# EAGLE board open-bldc-logic-teardrops (EAGLE 5.06)
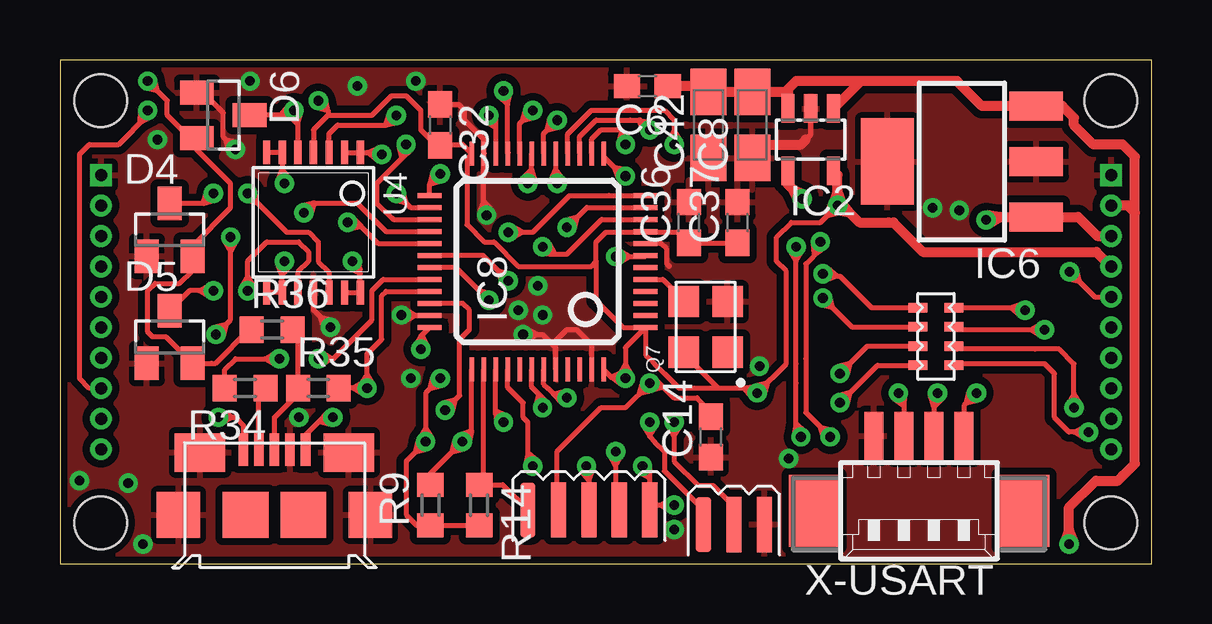
[diagram p0: board, top side]
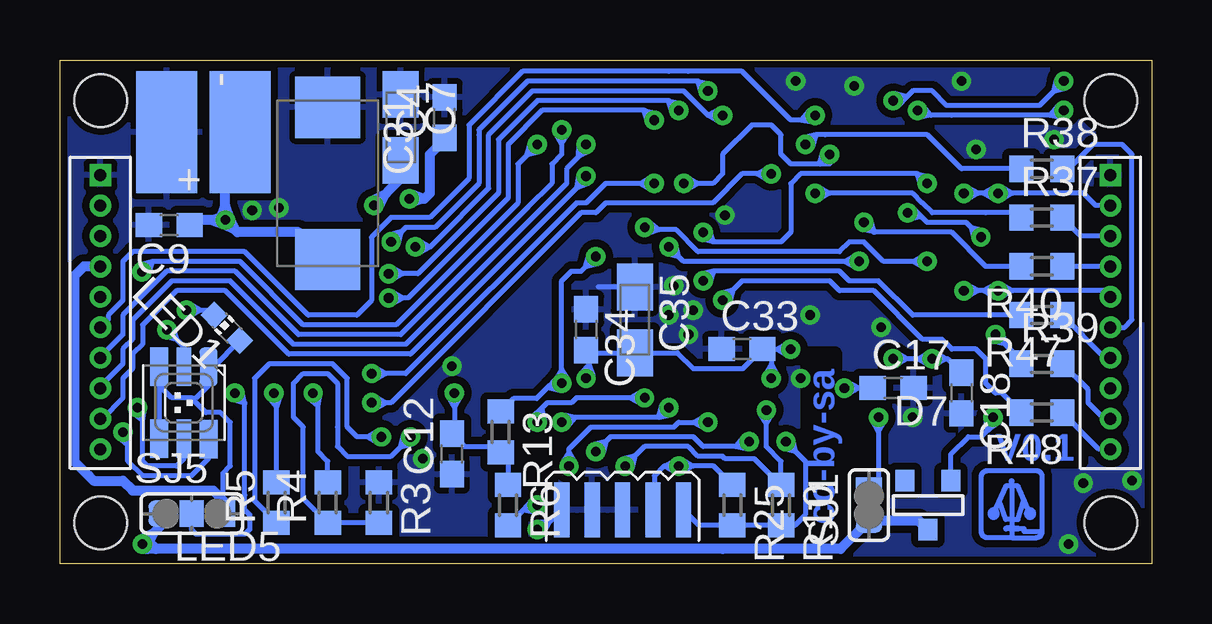
[diagram p1: board, bottom side, seen from below]

Size 45.5 x 21 mm. Coordinates in mm from the lower left corner, seen from the top.
Outline: 0,0 45.5,0 45.5,21 0,21 0,0
Copper layers (1*16): Top 0.035mm / dielectric 1.5mm / Bottom 0.035mm
Design rules "open-bldc *": minimum track width 7mil, minimum drill 0.3mm, track to track 8mil, track to pad 8mil, pad to pad 8mil, via to via 8mil, smd to smd 8mil, copper to edge 10mil, drill to drill 8mil, minimum pad ring 8mil, minimum via ring 8mil, stop-mask expansion 4mil, vias tented up to drill 0.4mm, thermal gap 10mil
Net classes: 0 default: width 0.152 mm, drill 0.305 mm, clearance 0.152 mm
Holes 2.2 mm at 1.7,1.7 43.8,1.7 43.8,19.3 1.7,19.3

## Footprints (pad centres in the part's own frame; a part is rotated, then mirrored left to right if it is on the bottom)
SMD2,54-5,08 = smd 2.54 x 5.08: 1 0,0
C0603 = smd 1.1 x 1: 1 -0.85,0; 2 0.85,0
A/3216-18R = smd 1.95 x 1.5: + 1.375,0; - -1.375,0
D/7343-31R = smd 2.55 x 2.7: + 3.175,0; - -3.175,0
SOT23 = smd 1 x 1.4: 1 -0.95,-1.1; 2 0.95,-1.1; 3 0,1.1
SOT-23 = smd 0.787 x 0.889: 1 0.025,-1.016; 2 -0.94,1.016; 3 0.991,1.016
PIN_HDR_EDG_1.27MM_3-1 = smd 2.3 x 0.635: P$1 0,0; P$2 0,1.27; P$3 0,2.54
SOT23-5 = smd 0.55 x 1.2: 1 -0.95,-1.3; 2 0,-1.3; 3 0.95,-1.3; 4 0.95,1.3; 5 -0.95,1.3
SOT223 = smd 1.219 x 2.235: 1 -2.311,-3.099; 2 0,-3.099; 3 2.311,-3.099 | smd 3.6 x 2.2: 4 0,3.099
LQFP48 = smd 0.2 x 1: 1 -2.75,-4.5; 2 -2.25,-4.5; 3 -1.75,-4.5; 4 -1.25,-4.5; 5 -0.75,-4.5; 6 -0.25,-4.5; 7 0.25,-4.5; 8 0.75,-4.5; 9 1.25,-4.5; 10 1.75,-4.5; 11 2.25,-4.5; 12 2.75,-4.5; 25 2.75,4.5; 26 2.25,4.5; 27 1.75,4.5; 28 1.25,4.5; 29 0.75,4.5; 30 0.25,4.5; 31 -0.25,4.5; 32 -0.75,4.5; 33 -1.25,4.5; 34 -1.75,4.5; 35 -2.25,4.5; 36 -2.75,4.5 | smd 1 x 0.2: 13 4.5,-2.75; 14 4.5,-2.25; 15 4.5,-1.75; 16 4.5,-1.25; 17 4.5,-0.75; 18 4.5,-0.25; 19 4.5,0.25; 20 4.5,0.75; 21 4.5,1.25; 22 4.5,1.75; 23 4.5,2.25; 24 4.5,2.75; 37 -4.5,2.75; 38 -4.5,2.25; 39 -4.5,1.75; 40 -4.5,1.25; 41 -4.5,0.75; 42 -4.5,0.25; 43 -4.5,-0.25; 44 -4.5,-0.75; 45 -4.5,-1.25; 46 -4.5,-1.75; 47 -4.5,-2.25; 48 -4.5,-2.75
PIN_HDR_1.27MM_10 = drill 0.5 square: P$1 0,0 | drill 0.5 round: P$2 0,1.27; P$3 0,2.54; P$4 0,3.81; P$5 0,5.08; P$6 0,6.35; P$7 0,7.62; P$8 0,8.89; P$9 0,10.16; P$10 0,11.43
PIN_HDR_EDG_1.27MM_5-2 = smd 2.3 x 0.635: P$1 0,0; P$3 0,1.27; P$5 0,2.54; P$7 0,3.81; P$9 0,5.08 | smd 2.3 x 0.635 bottom: P$2 0,0; P$4 0,1.27; P$6 0,2.54; P$8 0,3.81; P$10 0,5.08
CHIP-LED0603 = smd 0.8 x 0.8: A 0,-0.75; C 0,0.75
PLCC6 = smd 0.75 x 1.6: A1 -1.025,-1.5; A2 1.025,-1.5; A3 1.025,1.5; C1 -1.025,1.525 | smd 0.6 x 1.6: C2 0,-1.5; C3 0,1.5
ASE_OSCILLATOR = smd 1.295 x 1.27: 1 -1.041,-0.902; 2 1.067,-0.902; 3 1.067,0.927; 4 -1.041,0.927
R0603 = smd 1 x 1.1: 1 -0.85,0; 2 0.85,0
R4N1206 = smd 0.4 x 0.8: 1 0,0; 2 0,1.5; 3 0.8,0; 4 0.8,1.5; 5 1.6,0; 6 1.6,1.5; 7 2.4,0; 8 2.4,1.5
SJ1S = smd 1 x 1.1: 1 -0.65,-0.005; 2 0.65,-0.005
SJ2S = smd 1 x 1.1: 1 -1.3,0; 2 0,0; 3 1.3,0
ZX62-B-5PA = smd 1.8 x 1.9: GND_LEFT -4,0; GND_RIGHT 4,0 | smd 1.9 x 1.9: GND_MID_LEFT -1.2,0; GND_MID_RIGHT 1.2,0 | smd 2.1 x 1.6: GND_UP_LEFT -3.1,2.6; GND_UP_RIGHT 3.1,2.6 | smd 0.4 x 1.35: PIN_1 -1.3,2.725; PIN_2 -0.65,2.725; PIN_3 0,2.725; PIN_4 0.65,2.725; PIN_5 1.3,2.725
TSSOP_14 = smd 0.305 x 0.991: 1 -1.95,-2.918; 2 -1.3,-2.918; 3 -0.65,-2.918; 4 0,-2.918; 5 0.65,-2.918; 6 1.3,-2.918; 7 1.95,-2.918; 8 1.95,2.918; 9 1.3,2.918; 10 0.65,2.918; 11 0,2.918; 12 -0.65,2.918; 13 -1.3,2.918; 14 -1.95,2.918
53261-04 = smd 0.8 x 2: 1 1.875,-2.5; 2 0.625,-2.5; 3 -0.625,-2.5; 4 -1.875,-2.5 | smd 2.1 x 3: S1 4.375,0.625; S2 -4.375,0.625

## Placement (x,y rotation side)
+  BATT+  [SMD2,54-5,08]  38,17.98 0 bottom
-  BATT-  [SMD2,54-5,08]  41.05,17.98 180 bottom
C4  10nF  [C0603]  29.46,18.59 90 bottom
C6  100nF  [C0603]  24.49,19.91 180 top
C7  4µ7  [A/3216-18R]  31.29,18.19 270 bottom
C8  1µ  [A/3216-18R]  28.85,18.29 90 top
C9  100n  [C0603]  40.94,14.12 180 bottom
C12  10nF  [C0603]  29.16,4.57 90 bottom
C14  100nF  [C0603]  27.13,5.28 90 top
C17  47p  [C0603]  10.77,7.32 0 bottom
C18  47p  [C0603]  7.92,7.11 270 bottom
C31  100µ  [D/7343-31R]  34.34,15.85 270 bottom
C32  100nF  [C0603]  15.85,18.29 270 top
C33  100nF  [C0603]  17.07,8.94 0 bottom
C34  100nF  [C0603]  23.57,9.75 270 bottom
C35  4µ7  [A/3216-18R]  21.54,10.16 270 bottom
C36  10nF  [C0603]  26.21,14.22 90 top
C37  1µ  [C0603]  28.24,14.22 90 top
C42  4µ7  [A/3216-18R]  27.03,18.29 90 top
D4  BAS70-04  [SOT23]  4.57,13.92 0 top
D5  BAS70-04  [SOT23]  4.57,9.45 0 top
D6  BAS70-04  [SOT23]  6.81,18.69 270 top
D7  BAS21  [SOT-23]  9.35,2.44 0 bottom
I2C  PIN_HDR_EDG_1.27MM_3-1  [PIN_HDR_EDG_1.27MM_3-1]  26.82,1.63 270 top
IC2  LP2992  [SOT23-5]  31.29,17.68 180 top
IC6  5V vreg  [SOT223]  37.59,16.76 90 top
IC8  STM32-48  [LQFP48]  19.91,12.6 90 top
JP11  PIN_HDR_1.27MM_10  [PIN_HDR_1.27MM_10]  1.71,16.2 180 bottom
JP12  PIN_HDR_1.27MM_10  [PIN_HDR_1.27MM_10]  43.81,16.2 180 bottom
JTAG  PIN_HDR_EDG_1.27MM_5-2  [PIN_HDR_EDG_1.27MM_5-2]  19.51,2.24 270 top
LED1  AMBER  [CHIP-LED0603]  38.54,9.83 45 bottom
LED5  LED_LRTB_G6TG  [PLCC6]  40.34,6.71 180 bottom
Q7  8MHz  [ASE_OSCILLATOR]  26.92,9.86 90 top
R3  10k  [R0603]  32.21,2.54 270 bottom
R4  100R  [R0603]  34.34,2.54 90 bottom
R5  100R  [R0603]  36.47,2.54 90 bottom
R6  10k  [R0603]  26.82,2.44 270 bottom
R9  10k  [R0603]  15.44,2.44 90 top
R10  10k  [R0603]  15.44,2.44 270 bottom
R13  10k  [R0603]  27.13,5.49 270 bottom
R14  10k  [R0603]  17.48,2.44 270 top
R25  10k  [R0603]  17.48,2.44 270 bottom
R34  22  [R0603]  7.72,7.32 180 top
R35  22  [R0603]  10.77,7.32 0 top
R36  1k5  [R0603]  8.84,9.75 0 top
R37  1k  [R0603]  4.57,14.43 0 bottom
R38  1k  [R0603]  4.57,16.46 0 bottom
R39  1k  [R0603]  4.57,8.33 0 bottom
R40  1k  [R0603]  4.57,12.4 180 bottom
R47  1k  [R0603]  4.57,10.36 180 bottom
R48  1k  [R0603]  4.57,6.3 180 bottom
RN1  1k  [R4N1206]  35.76,10.67 270 top
SJ1  [SJ1S]  11.79,2.44 90 bottom
SJ5  SJ2S  [SJ2S]  40.01,2.08 0 bottom
U3  ZX62-B-5PA  [ZX62-B-5PA]  8.94,2.03 0 top
U4  MCP6004  [TSSOP_14]  10.57,14.22 180 top
X-USART  53261-04  [53261-04]  35.81,2.83 180 top

## Library data of the parts
+ - = wirepad
C4 C6-C9 C12 C14 C17 C18 C31-C37 C42 R3-R6 R9 R10 R13 R14 R25 R34-R40 R47 R48 = rcl
D4-D6 = diode
D7 = zetex
I2C IC2 IC8 JP11 JP12 JTAG LED5 Q7 RN1 SJ1 SJ5 U3 U4 = open-bldc
IC6 = linear-technology
LED1 = led
X-USART = con-molex

## Nets
+3V3: C7.+ C12.2 C32.2 C33.2 C34.2 C35.+ C36.1 C37.1 D4.2 D5.2 D6.2 IC2.5 IC8.1 IC8.9 IC8.24 IC8.36 IC8.48 JP12.P$4 JTAG.P$2 LED1.A LED5.A1 LED5.A2 LED5.A3 Q7.4 R6.1 R9.1 R10.2 R13.2 R14.2 R25.2 R36.1 SJ5.3 U4.4
+5V: C6.1 C8.+ C42.+ D7.1 IC2.1 IC2.3 IC6.3 JP12.P$2 SJ1.1 SJ5.1
+12V: +.1 C9.1 C31.+ IC6.1 JP12.P$3
BUF_I/BEMF_A: IC8.10 U4.13 U4.14
BUF_I/BEMF_B: IC8.11 U4.8 U4.9
BUF_I/BEMF_C: IC8.12 U4.6 U4.7
BUF_I_SENSE: IC8.19 U4.1 U4.2
CTRL_A+: JP11.P$4 R40.1
CTRL_A-: JP11.P$3 R37.2
CTRL_B+: JP11.P$7 R47.1
CTRL_B-: JP11.P$6 R38.2
CTRL_C+: JP11.P$10 R48.1
CTRL_C-: JP11.P$9 R39.2
GND: -.1 C4.2 C6.2 C7.- C8.- C9.2 C12.1 C14.1 C17.2 C18.2 C31.- C32.1 C33.1 C34.1 C35.- C36.2 C37.2 C42.- D4.1 D5.1 D6.1 I2C.P$3 IC2.2 IC6.2 IC6.4 IC8.8 IC8.23 IC8.35 IC8.44 IC8.47 JP11.P$1 JP12.P$1 JTAG.P$6 JTAG.P$8 JTAG.P$10 Q7.2 R3.1 U3.GND_LEFT U3.GND_RIGHT U3.GND_UP_LEFT U3.GND_UP_RIGHT U3.PIN_4 U4.11 X-USART.1
I/BEMF_A: D4.3 JP11.P$2 U4.12
I/BEMF_B: D5.3 JP11.P$5 U4.10
I/BEMF_C: D6.3 JP11.P$8 U4.5
I_SENSE: JP12.P$6 U4.3
LED1: IC8.20 RN1.1
LED2: IC8.18 RN1.3
LED3: IC8.17 RN1.5
LED4: IC8.25 RN1.7
MOT_TEMP: IC8.14 JP12.P$8
N$1: IC8.29 R40.2
N$2: LED5.C1 RN1.8
N$3: LED1.C RN1.2
N$4: LED5.C3 RN1.6
N$5: LED5.C2 RN1.4
N$6: IC8.26 R37.1
N$8: SJ5.2 X-USART.4
N$9: R4.2 X-USART.2
N$20: R5.2 X-USART.3
N$22: C4.1 IC2.4
N$25: R34.1 U3.PIN_2
N$26: SJ1.2 U3.PIN_5
N$28: R35.1 R36.2 U3.PIN_3
N$36: IC8.27 R38.1
N$39: IC8.28 R39.1
N$40: IC8.5 Q7.3
N$42: IC8.30 R47.2
N$45: IC8.31 R48.2
NC: JP12.P$10
PS_ID: IC8.16 JP12.P$5
RST: C14.2 IC8.7 JTAG.P$3 R13.1
RXD: IC8.22 R3.2 R4.1
SCL: I2C.P$1 IC8.42
SDA: I2C.P$2 IC8.43
TCK: IC8.37 JTAG.P$7 R9.2
TDI: IC8.38 JTAG.P$1 R14.1
TDO: IC8.39 JTAG.P$9 R6.2
TEMP: IC8.15 JP12.P$7
TMS: IC8.34 JTAG.P$5 R10.1
TRST: IC8.40 JTAG.P$4 R25.1
TXD: IC8.21 R5.1
USB_+5V: D7.3 U3.PIN_1
USB_DM: C18.1 IC8.32 R34.2
USB_DP: C17.1 IC8.33 R35.2
V_BATT: IC8.13 JP12.P$9

## Tracks (layer width: path | path; a pad name or v marks a point on that pad's centre or on a via)
+3V3  (via drill 0.4)
  Top 0.203: v23.57,7.72 23.04,7.72 IC8.48 | IC8.1 23.57,9.01 v23.57,7.72 | v15.04,8.94 15.04,9.47 IC8.36 | IC8.1 24.41,8.71 24.59,8.53 24.79,8.33 25.2,7.92 25.4,7.72 25.81,7.32 27.43,7.32 | 27.43,7.32 28.85,7.32 v29.06,7.11 | U4.4 10.57,18.09 11.18,18.69 | 11.18,18.69 13.01,18.69 13.82,19.51 14.43,19.51 15.04,18.9 15.04,18.09 15.68,17.44 C32.2 15.89,17.48 16.79,17.48 IC8.24 16.96,16.89 16.96,14.13 17.68,13.41 18.09,13.41 19.1,12.39 22.15,12.39 22.35,12.6 | v15.24,5.08 14.43,4.27 14.43,2.03 14.87,1.59 R10.2 R25.2 | v15.24,5.08 15.24,5.49 15.24,7.11 v15.85,7.72 | v32.41,14.94 31.7,14.22 30.48,14.22 29.87,13.61 29.87,12.6 30.28,12.19 30.28,8.33 v29.06,7.11 | 27.43,7.32 26.4,8.34 26.4,8.41 Q7.4 | IC8.1 23.48,9.85 22.35,10.97 22.35,12.6 | 22.35,12.6 22.35,13.41 22.76,13.82 24.38,13.82 | 24.38,13.82 IC8.9 24.38,13.82 | v3.66,20.12 4.47,19.3 4.47,18.69 5.42,17.74 D6.2 5.71,17.25 5.89,17.07 7.11,15.85 7.11,14.83 5.52,13.24 D4.2 5.52,12.23 4.98,11.68 3.96,11.68 3.66,11.38 3.66,9.65 3.86,9.45 4.42,9.45 D5.2 6.32,8.35 6.48,8.35 7.89,9.75 R36.1 | v10.77,19.3 11.18,18.9 11.18,18.69 | 24.38,13.82 25.77,13.82 C36.1 C37.1 | v32.41,14.94 32.49,14.64 31.99,14.51 32.12,15.01 v32.41,14.94 | v23.57,7.72 23.39,7.48 22.98,7.79 23.45,8 v23.57,7.72 | v23.57,7.72 23.31,7.87 23.57,8.32 23.83,7.87 v23.57,7.72 | v15.04,8.94 14.79,9.12 15.1,9.54 15.31,9.06 v15.04,8.94 | v29.06,7.11 28.83,6.92 28.49,7.32 29,7.41 v29.06,7.11 | v29.06,7.11 28.98,7.4 29.48,7.54 29.35,7.04 v29.06,7.11 | v15.24,5.08 15.32,4.79 14.82,4.66 14.95,5.16 v15.24,5.08 | v15.24,5.08 14.98,5.23 15.24,5.68 15.5,5.23 v15.24,5.08
  Top 0.203: v15.85,7.72 15.93,7.43 15.43,7.3 15.56,7.8 v15.85,7.72 | v3.66,20.12 3.95,20.19 4.08,19.69 3.58,19.82 v3.66,20.12 | v10.77,19.3 11.06,19.37 11.18,18.86 10.68,19.02 v10.77,19.3
  Top 0.406: v32.41,14.94 32.41,16.21 IC2.5 | JP12.P$4 43.2,13 35.97,13 34.75,14.22 34.54,14.22 33.33,14.22 32.61,14.94 v32.41,14.94 | v32.41,14.94 32.22,15 32.41,15.54 32.6,15 v32.41,14.94 | v32.41,14.94 32.56,15.06 32.92,14.62 32.37,14.74 v32.41,14.94
  Bottom 0.203: JTAG.P$2 18.86,1.59 R25.2 R10.2 | 23.45,8.79 C34.2 | 23.45,8.79 C35.+ 19.76,8.79 19.1,8.13 17.03,8.13 C33.2 | 23.45,8.79 23.45,7.84 v23.57,7.72 | R10.2 15.07,1.22 | C33.2 v15.04,8.94 | v29.06,7.11 29.06,5.93 29.16,5.83 C12.2 28.65,4.91 28.65,4.88 27.94,4.88 27.37,4.88 R13.2 26.82,4.33 R6.1 27.13,3.59 | v15.24,5.08 14.43,4.27 14.43,2.03 14.87,1.59 R10.2 | C33.2 16.05,8.78 | v15.85,7.72 15.85,8.57 C33.2 | LED1.A 39.09,8.21 LED5.A1 39.31,7.43 39.83,6.91 40.03,6.91 | LED5.A3 LED5.A2 41.36,7.43 40.84,6.91 40.03,6.91 | 40.03,6.91 39.42,6.3 38.81,6.3 38.41,5.89 38.41,4.06 38.7,3.76 38.7,2.64 | v3.66,20.12 4.67,19.1 8.53,19.1 9.14,19.71 9.96,19.71 10.36,19.3 v10.77,19.3 | v23.57,7.72 23.29,7.82 23.45,8.31 23.8,7.92 v23.57,7.72 | v15.04,8.94 15.19,9.2 15.64,8.94 15.19,8.68 v15.04,8.94 | v29.06,7.11 29.32,6.96 29.06,6.51 28.8,6.96 v29.06,7.11 | v15.24,5.08 15.32,4.79 14.82,4.66 14.95,5.16 v15.24,5.08 | v15.85,7.72 15.59,7.87 15.85,8.32 16.11,7.87 v15.85,7.72 | v3.66,20.12 3.95,20.19 4.08,19.69 3.58,19.82 v3.66,20.12 | v10.77,19.3 10.55,19.1 10.19,19.47 10.7,19.6 v10.77,19.3
  Bottom 0.406: C7.+ 31.29,16.05 v32.41,14.94 | JP12.P$4 44.51,12.39 44.91,11.99 44.91,4.27 44.3,3.66 44.09,3.45 42.88,3.45 42.47,3.05 39.11,3.05 38.7,2.64 SJ5.3 | v32.41,14.94 32.23,14.85 31.99,15.36 32.5,15.12 v32.41,14.94
+5V  (via drill 0.4)
  Top 0.406: 33.73,20.12 37.39,20.12 38.43,19.07 IC6.3 41.78,19.07 42.27,18.59 42.27,18.29 43.08,17.48 44.3,17.48 44.81,16.97 44.81,14.63 | 33.73,20.12 33.38,20.12 IC2.1 | 30.34,19.78 IC2.3 | 30.34,19.78 30.68,20.12 33.73,20.12 | 44.81,14.63 44.5,14.94 44.5,14.93 JP12.P$2 | 44.81,14.63 44.81,4.17 44.3,3.66 44.09,3.45 43.18,3.45 42.06,2.34 v42.06,0.81 | C42.+ 26.64,20.05 | C6.1 26.77,19.91 C42.+ | C42.+ C8.+ 30.23,19.66 30.34,19.78 | v42.06,0.81 41.87,0.88 42.06,1.41 42.25,0.88 v42.06,0.81
  Bottom 0.406: v42.06,0.81 41.3,1.57 SJ5.1 | D7.1 9.69,1.79 SJ1.1 12.96,0.61 17.88,0.61 41.86,0.61 arc90 v42.06,0.81 | v42.06,0.81 41.88,0.73 41.64,1.24 42.15,0.99 v42.06,0.81 | v42.06,0.81 42.06,0.61 41.5,0.61 41.94,0.97 v42.06,0.81
+12V  (via drill 0.4)
  Top 0.406: JP12.P$3 43.24,13.66 42.44,14.45 IC6.1 38.73,14.45 v38.61,14.33 | v38.61,14.33 38.63,14.52 39.19,14.45 38.71,14.15 v38.61,14.33
  Bottom 0.406: v38.61,14.33 38.1,13.82 35.56,13.82 34.42,12.68 C31.+ | v38.61,14.33 39.89,14.33 C9.1 | +.1 38.61,17.37 v38.61,14.33 | v38.61,14.33 38.69,14.14 38.18,13.9 38.43,14.41 v38.61,14.33 | v38.61,14.33 38.67,14.51 39.21,14.33 38.67,14.14 v38.61,14.33 | v38.61,14.33 38.42,14.39 38.61,14.93 38.8,14.39 v38.61,14.33
BUF_I/BEMF_A  (via drill 0.4)
  Top 0.203: U4.13 U4.14 12.52,12.27 v12.19,12.6 | v20.12,13.21 20.42,12.9 21.13,12.9 22.58,14.35 IC8.10 | v12.19,12.6 12.49,12.61 12.52,12.09 12.05,12.33 v12.19,12.6 | v20.12,13.21 20.38,13.36 20.63,12.9 20.11,12.91 v20.12,13.21
  Bottom 0.203: v12.19,12.6 19.51,12.6 v20.12,13.21 | v12.19,12.6 12.34,12.86 12.79,12.6 12.34,12.34 v12.19,12.6 | v20.12,13.21 20.19,12.92 19.69,12.78 19.82,13.29 v20.12,13.21
BUF_I/BEMF_B  (via drill 0.4)
  Top 0.203: U4.8 U4.9 9.27,12.6 v9.35,12.6 | v21.13,14.02 21.96,14.85 IC8.11 | v9.35,12.6 9.59,12.41 9.27,12 9.07,12.48 v9.35,12.6 | v21.13,14.02 21.06,14.31 21.56,14.45 21.42,13.94 v21.13,14.02
  Bottom 0.203: v9.35,12.6 11.18,12.6 11.99,13.41 12.6,13.41 13.01,13.01 18.9,13.01 19.81,13.92 21.03,13.92 v21.13,14.02 | v9.35,12.6 9.5,12.86 9.95,12.6 9.5,12.34 v9.35,12.6 | v21.13,14.02 21.03,13.74 20.54,13.92 20.94,14.25 v21.13,14.02
BUF_I/BEMF_C  (via drill 0.4)
  Top 0.203: U4.7 U4.6 9.27,15.93 v9.35,15.85 | v18.69,13.82 19.71,13.82 21.23,15.34 22.86,15.34 22.87,15.35 IC8.12 | v9.35,15.85 9.07,15.96 9.27,16.44 9.59,16.04 v9.35,15.85 | v18.69,13.82 18.85,14.08 19.29,13.82 18.85,13.56 v18.69,13.82
  Bottom 0.203: v18.69,13.82 18.29,13.41 15.44,13.41 15.04,13.82 15.04,15.85 14.63,16.26 9.75,16.26 v9.35,15.85 | v9.35,15.85 9.28,16.14 9.79,16.26 9.63,15.76 v9.35,15.85 | v18.69,13.82 18.76,13.52 18.25,13.41 18.41,13.91 v18.69,13.82
BUF_I_SENSE  (via drill 0.4)
  Top 0.203: U4.2 U4.1 13.34,17.14 v13.41,17.07 | v19.51,15.85 19.66,16.01 IC8.19 | v13.41,17.07 13.23,16.83 12.82,17.14 13.29,17.35 v13.41,17.07 | v19.51,15.85 19.3,16.06 19.66,16.43 19.8,15.93 v19.51,15.85
  Bottom 0.203: v13.41,17.07 13.41,16.66 15.04,16.66 15.44,17.07 15.44,17.88 15.85,18.29 16.66,18.29 17.88,17.07 17.88,16.26 18.29,15.85 v19.51,15.85 | v13.41,17.07 13.7,17.16 13.85,16.66 13.35,16.77 v13.41,17.07 | v19.51,15.85 19.36,15.59 18.91,15.85 19.36,16.11 v19.51,15.85
CTRL_A+
  Bottom 0.203: JP11.P$4 R40.1
CTRL_A-
  Bottom 0.203: JP11.P$3 2.96,13.66 R37.2
CTRL_B+
  Bottom 0.203: JP11.P$7 1.94,8.58 R47.1
CTRL_B-
  Bottom 0.203: JP11.P$6 1.12,9.85 0.81,10.16 0.81,17.07 1.22,17.48 2.44,17.48 3.45,16.46 R38.2
CTRL_C+
  Bottom 0.203: JP11.P$10 2.19,4.77 R48.1
CTRL_C-
  Bottom 0.203: JP11.P$9 1.98,6.04 2.64,6.71 2.64,7.25 R39.2
GND  (via drill 0.4)
  Top 0.203: IC8.8 25.06,13.35 25.3,13.11 25.3,12.5 25.4,12.39 | IC8.23 17.68,17.1 | v19.3,9.55 20.12,9.55 20.66,9 IC8.44 20.66,9.28 21.13,9.75 21.54,9.75 22.16,9.13 IC8.47 | 31.09,17.68 31.29,17.88 IC2.2 | IC8.23 17.66,14.64 v17.78,14.53 | D6.1 5.96,19.64 6.81,18.8 6.81,17.78 v7.32,17.27 | C32.1 16.62,19.14 16.87,18.9 16.87,18.49 17.66,17.69 IC8.23 | IC8.35 14.24,10.35 v14.22,10.36 | v11.28,9.86 10.57,10.57 U4.11 | v7.32,17.27 7.02,17.2 6.89,17.7 7.39,17.56 v7.32,17.27 | v19.3,9.55 19.46,9.81 19.9,9.55 19.46,9.29 v19.3,9.55 | v11.28,9.86 10.99,9.78 10.85,10.28 11.36,10.15 v11.28,9.86 | v14.22,10.36 14.38,10.62 14.82,10.35 14.37,10.1 v14.22,10.36 | v17.78,14.53 17.5,14.63 17.66,15.12 18.01,14.73 v17.78,14.53
  Top 0.406: 31.09,17.68 30.91,17.5 | C8.- 29.42,17.48 30.89,17.48
  Bottom 0.203: C35.- 23.06,11.54 | JTAG.P$10 25.4,1.42 v25.6,1.42 | v25.6,1.42 25.34,1.28 25.09,1.73 25.61,1.72 v25.6,1.42
  other vias: 9.96,6.1 37.49,14.73 36.37,14.83 19.91,11.58 30.38,4.37 2.84,3.35 29.16,8.23 12.4,19.91 7.92,20.12 14.83,20.12 19.1,10.57 20.12,10.36 14.63,7.72 0.81,3.45 3.45,0.81 4.06,17.68
  pour Top (isolate 0.305): 45.21,20.88 0.1,20.85 0.1,0 45.21,0
  pour Bottom (isolate 0.305): 45.21,20.88 0.1,20.85 0.1,0 45.21,0
I/BEMF_A  (via drill 0.4)
  Top 0.203: U4.12 11.22,12.15 10.77,12.6 10.77,13.41 10.36,13.82 9.45,13.82 8.13,15.14 v7.82,15.44 | D4.3 5.98,15.02 v6.4,15.44 | v7.82,15.44 8.12,15.52 8.25,15.02 7.75,15.15 v7.82,15.44 | v6.4,15.44 6.48,15.15 5.98,15.02 6.11,15.52 v6.4,15.44
  Bottom 0.203: JP11.P$2 2.33,14.93 2.85,15.44 v6.4,15.44 | v6.4,15.44 6.5,15.44 v7.82,15.44 | v7.82,15.44 7.67,15.18 7.22,15.44 7.67,15.7 v7.82,15.44 | v6.4,15.44 6.25,15.18 5.8,15.44 6.25,15.7 v6.4,15.44 | v6.4,15.44 6.55,15.7 7,15.44 6.55,15.18 v6.4,15.44
I/BEMF_B  (via drill 0.4)
  Top 0.203: U4.10 9.92,12.15 10.36,12.6 10.36,13.01 9.96,13.41 8.62,13.41 7.82,12.62 v7.82,11.38 | D5.3 5.4,11.38 v6.4,11.38 | v7.82,11.38 7.56,11.53 7.82,11.98 8.08,11.53 v7.82,11.38 | v6.4,11.38 6.25,11.12 5.8,11.38 6.25,11.64 v6.4,11.38
  Bottom 0.203: v6.4,11.38 v7.82,11.38 | v6.4,11.38 1.97,11.38 JP11.P$5 | v7.82,11.38 7.67,11.12 7.22,11.38 7.67,11.64 v7.82,11.38 | v6.4,11.38 6.55,11.64 7,11.38 6.55,11.12 v6.4,11.38 | v6.4,11.38 6.25,11.12 5.8,11.38 6.25,11.64 v6.4,11.38
I/BEMF_C  (via drill 0.4)
  Top 0.203: JP11.P$8 1.22,7.31 0.81,7.72 0.81,17.07 1.22,17.48 2.44,17.48 3.66,18.69 v3.66,18.9 | v9.75,18.9 9.92,18.73 U4.5 | D6.3 9.55,18.69 v9.75,18.9 | v3.66,18.9 3.8,18.63 3.35,18.38 3.36,18.9 v3.66,18.9 | v9.75,18.9 10.05,18.82 9.92,18.32 9.54,18.68 v9.75,18.9 | v9.75,18.9 9.7,18.6 9.19,18.69 9.52,19.09 v9.75,18.9
  Bottom 0.203: v3.66,18.9 3.66,18.69 8.33,18.69 9.55,18.69 v9.75,18.9 | v3.66,18.9 3.89,19.09 4.22,18.69 3.71,18.6 v3.66,18.9 | v9.75,18.9 9.7,18.6 9.19,18.69 9.52,19.09 v9.75,18.9
I_SENSE  (via drill 0.4)
  Top 0.203: U4.3 11.22,17.92 11.58,18.29 13.61,18.29 v14.02,18.69 | v14.02,18.69 14.09,18.4 13.58,18.29 13.73,18.78 v14.02,18.69
  Bottom 0.203: JP12.P$6 43.48,10.18 43.48,10.36 42.88,10.97 42.88,12.6 42.47,13.01 37.8,13.01 35.15,10.36 33.12,10.36 32.51,10.97 32.51,13.61 31.7,14.43 30.07,14.43 28.45,16.05 28.45,18.29 26.21,20.52 20.12,20.52 19.3,20.52 17.07,20.52 15.04,18.49 14.22,18.49 v14.02,18.69 | v14.02,18.69 14.25,18.89 14.59,18.49 14.07,18.4 v14.02,18.69
LED1  (via drill 0.4)
  Top 0.203: v19.71,18.9 19.16,18.35 IC8.20 | RN1.1 33.83,10.67 32.51,11.99 31.9,11.99 v31.8,12.09 | v31.8,12.09 31.99,12.32 32.39,11.99 31.91,11.81 v31.8,12.09 | v19.71,18.9 19.79,18.61 19.29,18.47 19.42,18.98 v19.71,18.9
  Bottom 0.203: v31.8,12.09 30.58,12.09 27.23,15.44 27.23,17.68 25.6,19.3 20.12,19.3 v19.71,18.9 | v31.8,12.09 31.65,11.83 31.2,12.09 31.65,12.35 v31.8,12.09 | v19.71,18.9 19.64,19.19 20.15,19.3 20,18.81 v19.71,18.9
LED2  (via drill 0.4)
  Top 0.203: v20.73,18.49 20.16,17.93 IC8.18 | RN1.3 33.01,9.87 v31.8,11.07 | v31.8,11.07 32.09,11.15 32.23,10.65 31.72,10.78 v31.8,11.07 | v20.73,18.49 20.8,18.2 20.3,18.07 20.43,18.57 v20.73,18.49
  Bottom 0.203: v31.8,11.07 30.99,11.07 26.82,15.24 26.82,17.48 25.4,18.9 21.13,18.9 v20.73,18.49 | v31.8,11.07 31.65,10.81 31.2,11.07 31.65,11.34 v31.8,11.07 | v20.73,18.49 20.66,18.79 21.17,18.9 21.02,18.4 v20.73,18.49
LED3  (via drill 0.4)
  Top 0.203: v20.73,15.85 20.66,15.91 IC8.17 | RN1.5 33.66,9.07 v32.51,7.92 | v32.51,7.92 32.44,8.22 32.94,8.35 32.8,7.85 v32.51,7.92 | v20.73,15.85 20.45,15.97 20.66,16.45 20.97,16.03 v20.73,15.85
  Bottom 0.203: v32.51,7.92 31.09,7.92 23.98,15.04 23.57,15.04 22.76,15.85 v20.73,15.85 | v32.51,7.92 32.36,7.66 31.91,7.92 32.36,8.19 v32.51,7.92 | v20.73,15.85 20.88,16.11 21.33,15.85 20.88,15.59 v20.73,15.85
LED4  (via drill 0.4)
  Top 0.203: v15.85,16.26 15.41,15.82 IC8.25 | RN1.7 34.07,8.27 v32.51,6.71 | v32.51,6.71 32.44,7 32.94,7.13 32.8,6.63 v32.51,6.71 | v15.85,16.26 15.93,15.96 15.43,15.83 15.56,16.33 v15.85,16.26
  Bottom 0.203: v32.51,6.71 31.7,6.71 23.77,14.63 23.16,14.63 22.76,15.04 18.29,15.04 17.07,16.26 v15.85,16.26 | v32.51,6.71 32.36,6.45 31.91,6.71 32.36,6.97 v32.51,6.71 | v15.85,16.26 16,16.52 16.45,16.26 16,15.99 v15.85,16.26
LOGO1
  Bottom 0.203: 5.83,1.08 6.84,1.08 arc90 7.1,1.33 7.1,3.62 arc90 6.84,3.87 4.81,3.87 arc90 4.56,3.62 4.56,1.33 | 5.83,1.08 4.81,1.08 arc-90 4.56,1.33 | 6.59,2.1 6.08,3.24 5.83,3.24 | 5.83,3.24 5.57,3.24 5.07,2.1 | 6.33,2.6 6.08,1.84 5.83,1.84 | 5.83,1.84 5.57,1.84 5.32,2.63 | 4.56,1.33 5.32,1.33 5.32,1.46 5.57,1.46 5.83,1.44 5.83,1.46 | 5.83,3.24 5.83,1.84 | 5.83,1.84 5.83,1.46 | 5.83,1.46 5.83,1.08 | 5.83,3.24 5.83,3.42
  Bottom 0.254: 5.57,1.46 5.83,1.46 6.05,1.46 | 5.83,3.42 5.83,3.44
  Bottom 0.508: 5.07,2.07 5.07,2.1 | 6.59,2.1 6.59,2.07
MOT_TEMP  (via drill 0.4)
  Top 0.203: v23.57,17.48 23.57,17.88 23.37,18.09 22.55,18.09 22.16,17.69 IC8.14 | v23.57,17.48 23.28,17.55 23.4,18.05 23.78,17.69 v23.57,17.48
  Bottom 0.203: JP12.P$8 43.81,7.39 42.88,8.33 42.88,8.94 42.47,9.35 42.47,10.16 40.84,11.79 38.41,11.79 35.76,9.14 31.09,9.14 25.6,14.63 24.38,15.85 24.38,16.46 23.57,17.27 v23.57,17.48 | v23.57,17.48 23.87,17.48 23.88,16.96 23.43,17.21 v23.57,17.48
N$1  (via drill 0.4)
  Top 0.203: v11.99,14.22 12.39,14.22 13.27,13.35 IC8.29 | v11.99,14.22 12.21,14.43 12.56,14.05 12.06,13.93 v11.99,14.22
  Bottom 0.203: R40.2 6.91,12.39 8.33,13.82 11.58,13.82 v11.99,14.22 | v11.99,14.22 12.05,13.93 11.55,13.82 11.7,14.31 v11.99,14.22
N$2  (via drill 0.4)
  Top 0.203: v42.88,5.49 42.06,5.49 41.45,6.1 41.45,7.92 41.05,8.33 37.33,8.33 RN1.8 | v42.88,5.49 42.72,5.23 42.27,5.49 42.72,5.75 v42.88,5.49
  Bottom 0.203: LED5.C1 39.31,4.38 40.03,3.66 42.06,3.66 42.67,4.27 42.67,5.28 v42.88,5.49 | v42.88,5.49 43.07,5.25 42.67,4.92 42.58,5.43 v42.88,5.49
N$3  (via drill 0.4)
  Top 0.203: RN1.2 40.13,10.67 v40.23,10.57 | v40.23,10.57 40.04,10.34 39.64,10.67 40.13,10.85 v40.23,10.57
  Bottom 0.203: LED1.C 39.28,10.57 v40.23,10.57 | v40.23,10.57 40.08,10.31 39.63,10.57 40.08,10.83 v40.23,10.57
N$4  (via drill 0.4)
  Top 0.203: v42.27,6.5 42.27,8.33 41.66,8.94 40.64,8.94 37.39,8.94 RN1.6 | v42.27,6.5 42.01,6.65 42.27,7.1 42.53,6.65 v42.27,6.5
  Bottom 0.203: LED5.C3 40.34,4.37 40.64,4.06 41.86,4.06 42.06,4.27 42.06,6.3 v42.27,6.5 | v42.27,6.5 42.46,6.27 42.06,5.94 41.97,6.45 v42.27,6.5
N$5  (via drill 0.4)
  Top 0.203: v41.05,9.75 37.38,9.75 RN1.4 | v41.05,9.75 40.9,9.49 40.45,9.75 40.9,10.01 v41.05,9.75
  Bottom 0.203: LED5.C2 40.34,9.04 v41.05,9.75 | v41.05,9.75 41.12,9.46 40.62,9.33 40.76,9.83 v41.05,9.75
N$6  (via drill 0.4)
  Top 0.203: v14.02,15.44 14.62,14.85 IC8.26 | v14.02,15.44 14.31,15.52 14.45,15.02 13.94,15.15 v14.02,15.44
  Bottom 0.203: v14.02,15.44 9.96,15.44 9.55,15.04 9.14,14.63 6.91,14.63 5.62,14.63 R37.1 | v14.02,15.44 13.87,15.18 13.42,15.44 13.87,15.7 v14.02,15.44
N$8  (via drill 0.4)
  Top 0.203: v38.2,7.11 37.68,6.59 X-USART.4 | v38.2,7.11 38.28,6.82 37.78,6.69 37.91,7.19 v38.2,7.11
  Bottom 0.203: v38.2,7.11 37.8,6.71 37.8,2.85 37.8,2.23 37.59,2.03 37.59,1.42 37.8,1.22 39.83,1.22 40.01,1.4 SJ5.2 | v38.2,7.11 38.29,6.82 37.8,6.67 37.91,7.18 v38.2,7.11
N$9  (via drill 0.4)
  Top 0.203: v34.95,7.11 35.18,6.88 X-USART.2 | v34.95,7.11 35.25,7.07 35.18,6.56 34.77,6.87 v34.95,7.11
  Bottom 0.203: R4.2 34.34,4.27 34.75,4.67 34.75,6.91 v34.95,7.11 | v34.95,7.11 35.14,6.88 34.75,6.55 34.65,7.06 v34.95,7.11
N$20  (via drill 0.4)
  Top 0.203: X-USART.3 36.43,6.97 v36.58,7.11 | v36.58,7.11 36.79,6.9 36.43,6.53 36.29,7.03 v36.58,7.11
  Bottom 0.203: 36.58,3.29 R5.2 36.47,7.01 v36.58,7.11 | v36.58,7.11 36.81,6.92 36.47,6.52 36.29,7.01 v36.58,7.11
N$22  (via drill 0.4)
  Top 0.406: IC2.4 30.34,15.81 v30.94,15.21 | v30.94,15.21 30.76,15.13 30.51,15.64 31.02,15.39 v30.94,15.21
  Bottom 0.406: C4.1 29.46,17.68 30.07,17.07 30.07,15.44 30.3,15.21 v30.94,15.21 | v30.94,15.21 30.87,15.03 30.34,15.21 30.87,15.4 v30.94,15.21
N$25
  Top 0.203: R34.1 8.29,7.03 U3.PIN_2
N$26  (via drill 0.4)
  Top 0.203: U3.PIN_5 10.24,5.36 10.97,6.1 v11.38,6.1 | v11.38,6.1 11.31,5.8 10.8,5.93 11.16,6.3 v11.38,6.1
  Bottom 0.203: v11.38,6.1 11.38,3.49 SJ1.2 | v11.38,6.1 11.64,5.94 11.38,5.5 11.12,5.94 v11.38,6.1
N$28
  Top 0.203: U3.PIN_3 8.94,6.1 9.92,7.08 R35.1 9.92,9.52 R36.2
N$36  (via drill 0.4)
  Top 0.203: v14.43,17.48 14.43,17.07 13.21,15.85 13.21,15.04 13.82,14.43 13.9,14.35 IC8.27 | v14.43,17.48 14.63,17.26 14.26,16.9 14.13,17.4 v14.43,17.48
  Bottom 0.203: v14.43,17.48 14.02,17.88 13.61,17.88 9.35,17.88 7.92,16.46 R38.1 | v14.43,17.48 14.14,17.39 13.99,17.88 14.49,17.77 v14.43,17.48
N$39  (via drill 0.4)
  Top 0.203: v6.5,9.55 7.11,10.16 v7.11,13.61 | v10.16,14.63 10.57,15.04 12.39,15.04 13.58,13.85 IC8.28 | v6.5,9.55 6.42,9.84 6.93,9.97 6.79,9.47 v6.5,9.55 | v7.11,13.61 7.37,13.46 7.11,13.01 6.85,13.46 v7.11,13.61 | v10.16,14.63 10.1,14.93 10.6,15.04 10.45,14.54 v10.16,14.63
  Bottom 0.203: v7.11,13.61 7.72,14.22 9.35,14.22 9.75,14.63 v10.16,14.63 | v6.5,9.55 5.42,8.47 R39.1 | v6.5,9.55 6.58,9.26 6.08,9.13 6.21,9.63 v6.5,9.55 | v7.11,13.61 7.04,13.91 7.54,14.04 7.4,13.54 v7.11,13.61 | v10.16,14.63 10.09,14.34 9.58,14.46 9.94,14.84 v10.16,14.63
N$40
  Top 0.203: Q7.3 26.06,10.92 25.2,11.79 25.13,11.85 IC8.5
N$42  (via drill 0.4)
  Top 0.203: v18.69,11.79 17.63,12.85 IC8.30 | v18.69,11.79 18.4,11.71 18.27,12.21 18.77,12.08 v18.69,11.79
  Bottom 0.203: v18.69,11.79 18.29,12.19 13.01,12.19 12.6,11.79 11.38,11.79 9.96,10.36 R47.2 | v18.69,11.79 18.41,11.7 18.25,12.19 18.76,12.08 v18.69,11.79
N$45  (via drill 0.4)
  Top 0.203: v17.88,10.97 16.51,12.35 IC8.31 | v17.88,10.97 17.59,10.9 17.46,11.4 17.96,11.26 v17.88,10.97
  Bottom 0.203: R48.2 6.24,7.11 6.5,7.11 6.91,7.52 6.91,8.53 7.32,8.94 8.33,8.94 8.74,9.35 9.55,9.35 11.58,11.38 13.01,11.38 13.41,11.79 17.07,11.79 v17.88,10.97 | v17.88,10.97 17.59,10.9 17.46,11.4 17.96,11.26 v17.88,10.97
PS_ID  (via drill 0.4)
  Top 0.203: v25.6,17.48 25.6,18.49 25.2,18.9 22.15,18.9 21.16,17.91 IC8.16 | v42.09,12.17 43.13,11.12 JP12.P$5 | v42.09,12.17 42.38,12.24 42.51,11.74 42.01,11.88 v42.09,12.17 | v25.6,17.48 25.34,17.63 25.6,18.07 25.86,17.63 v25.6,17.48
  Bottom 0.203: v42.09,12.17 41.66,12.6 38,12.6 35.36,9.96 31.5,9.96 26.42,15.04 26.42,16.66 v25.6,17.48 | v42.09,12.17 41.8,12.09 41.66,12.59 42.16,12.46 v42.09,12.17 | v25.6,17.48 25.89,17.55 26.03,17.05 25.53,17.18 v25.6,17.48
RST  (via drill 0.4)
  Top 0.203: v24.59,7.52 24.59,7.62 24.89,7.62 25.6,6.91 26.55,6.91 R13.1 C14.2 | v23.16,12.8 24.37,12.8 IC8.7 | v24.59,7.52 23.57,6.5 22.55,6.5 20.73,4.67 20.73,2.29 JTAG.P$3 | v24.59,7.52 24.66,7.23 24.16,7.09 24.3,7.6 v24.59,7.52 | v24.59,7.52 24.81,7.73 25.16,7.35 24.66,7.22 v24.59,7.52 | v23.16,12.8 23.32,13.06 23.77,12.8 23.32,12.54 v23.16,12.8
  Bottom 0.203: v24.59,7.52 24.59,7.62 | v24.59,7.52 24.59,11.79 24.18,12.19 23.77,12.19 v23.16,12.8 | R13.1 26.59,6.88 25.64,6.88 25.09,7.42 24.99,7.52 v24.59,7.52 | v24.59,7.52 24.33,7.67 24.59,8.12 24.85,7.67 v24.59,7.52 | v24.59,7.52 24.81,7.73 25.16,7.35 24.66,7.22 v24.59,7.52 | v23.16,12.8 23.46,12.88 23.59,12.38 23.09,12.51 v23.16,12.8
RXD  (via drill 0.4)
  Top 0.203: v30.89,5.28 30.68,5.49 30.68,7.52 30.68,8.33 v30.68,13.21 | v17.88,18.69 18.16,18.41 IC8.22 | v30.89,5.28 30.59,5.34 30.68,5.85 31.08,5.51 v30.89,5.28 | v30.68,13.21 30.94,13.06 30.68,12.61 30.42,13.06 v30.68,13.21 | v17.88,18.69 18.18,18.68 18.16,18.16 17.72,18.44 v17.88,18.69
  Bottom 0.203: R3.2 R4.1 35.36,2.71 35.36,5.69 35.76,6.1 35.76,7.32 35.76,7.52 35.36,7.92 34.34,7.92 33.93,7.52 33.93,5.69 33.93,4.88 33.53,4.47 31.7,4.47 v30.89,5.28 | v30.68,13.21 30.07,13.21 29.87,13.41 27.64,15.65 27.64,17.88 25.81,19.71 19.51,19.71 18.49,18.69 v17.88,18.69 | v30.89,5.28 31.18,5.36 31.31,4.86 30.81,4.99 v30.89,5.28 | v30.68,13.21 30.53,12.95 30.08,13.21 30.53,13.47 v30.68,13.21 | v17.88,18.69 18.03,18.95 18.48,18.69 18.03,18.43 v17.88,18.69
SCL  (via drill 0.4)
  Top 0.203: 26.72,2.03 26.82,2.03 I2C.P$1 26.82,2.23 25.2,3.86 25.2,4.67 24.79,5.08 24.59,5.28 v24.59,5.89 | v20.12,6.5 20.12,6.91 19.66,7.36 IC8.42 | v24.59,5.89 24.85,5.74 24.59,5.29 24.33,5.74 v24.59,5.89 | v20.12,6.5 19.82,6.57 19.95,7.08 20.32,6.72 v20.12,6.5
  Bottom 0.203: v24.59,5.89 24.38,6.1 21.13,6.1 20.52,6.1 v20.12,6.5 | v24.59,5.89 24.36,5.7 24.02,6.1 24.53,6.19 v24.59,5.89 | v20.12,6.5 20.41,6.59 20.56,6.1 20.05,6.21 v20.12,6.5
SDA  (via drill 0.4)
  Top 0.203: I2C.P$2 28.09,2.39 27.23,3.25 26.62,3.25 25.6,4.27 v25.6,5.89 | v21.13,6.91 20.73,6.91 20.32,7.32 20.16,7.47 IC8.43 | v25.6,5.89 25.86,5.74 25.6,5.29 25.34,5.74 v25.6,5.89 | v21.13,6.91 20.91,6.7 20.56,7.08 21.06,7.2 v21.13,6.91
  Bottom 0.203: v21.13,6.91 23.98,6.91 24.18,6.71 25.2,6.71 25.6,6.3 v25.6,5.89 | v25.6,5.89 25.31,5.96 25.43,6.47 25.81,6.11 v25.6,5.89 | v21.13,6.91 21.29,7.17 21.73,6.91 21.29,6.65 v21.13,6.91
TCK  (via drill 0.4)
  Top 0.203: 15.24,3.08 R9.2 15.44,3.76 v16.76,5.08 | v16.76,5.08 17.16,5.48 IC8.37 | v23.16,4.67 23.16,2.23 JTAG.P$7 | v23.16,4.67 23.43,4.52 23.16,4.07 22.9,4.52 v23.16,4.67 | v16.76,5.08 16.67,5.37 17.16,5.53 17.06,5.02 v16.76,5.08 | v16.76,5.08 16.84,4.79 16.34,4.66 16.47,5.16 v16.76,5.08
  Bottom 0.203: v16.76,5.08 16.87,5.08 17.07,4.88 18.69,4.88 19.1,5.28 22.55,5.28 v23.16,4.67 | v23.16,4.67 22.87,4.6 22.74,5.1 23.24,4.96 v23.16,4.67 | v16.76,5.08 17,5.27 17.33,4.88 16.82,4.78 v16.76,5.08
TDI
  Top 0.203: R14.1 17.48,3.05 | JTAG.P$1 18.45,3.29 R14.1 | IC8.38 17.66,3.48 R14.1
TDO  (via drill 0.4)
  Top 0.203: IC8.39 18.16,6.22 v18.49,5.89 | v24.28,4.06 24.59,3.76 JTAG.P$9 24.79,2.44 v25.6,2.44 | v18.49,5.89 18.19,5.88 18.16,6.4 18.63,6.16 v18.49,5.89 | v24.28,4.06 24.58,4.07 24.59,3.55 24.14,3.8 v24.28,4.06 | v25.6,2.44 25.45,2.18 25,2.44 25.45,2.7 v25.6,2.44
  Bottom 0.203: v18.49,5.89 19.71,5.89 19.91,5.69 22.76,5.69 23.37,5.69 24.28,4.78 v24.28,4.06 | v25.6,2.44 25.97,2.44 R6.2 | v18.49,5.89 18.64,6.15 19.09,5.89 18.64,5.63 v18.49,5.89 | v24.28,4.06 24.02,4.22 24.28,4.66 24.54,4.22 v24.28,4.06 | v25.6,2.44 25.83,2.63 26.17,2.24 25.66,2.14 v25.6,2.44
TEMP  (via drill 0.4)
  Top 0.203: IC8.15 21.66,17.8 22.35,18.49 23.77,18.49 24.18,18.49 v24.59,18.09 | v24.59,18.09 24.3,18 24.15,18.49 24.65,18.38 v24.59,18.09
  Bottom 0.203: JP12.P$7 43.81,8.61 42.88,9.55 42.88,9.75 42.88,10.36 41.05,12.19 38.2,12.19 35.56,9.55 31.29,9.55 26.01,14.83 24.99,15.85 24.99,16.66 24.59,17.07 v24.59,18.09 | v24.59,18.09 24.85,17.93 24.59,17.48 24.33,17.93 v24.59,18.09
TMS  (via drill 0.4)
  Top 0.203: v16.05,6.4 16.66,7.01 16.66,9.35 17.07,9.75 17.07,10.57 16.79,10.85 IC8.34 | v21.95,4.06 22.05,3.96 JTAG.P$5 | v21.95,4.06 22.23,3.96 22.05,3.47 21.71,3.87 v21.95,4.06 | v16.05,6.4 15.98,6.69 16.48,6.83 16.34,6.32 v16.05,6.4
  Bottom 0.203: v21.95,4.06 21.13,4.88 19.3,4.88 18.9,4.47 17.88,4.47 | 17.78,4.37 17.88,4.47 | 17.78,4.37 17.88,4.47 | 17.78,4.37 17.88,4.47 | 17.78,4.37 16.56,4.37 15.44,3.25 R10.1 15.44,4.27 16.05,4.88 v16.05,6.4 | v21.95,4.06 21.65,3.99 21.52,4.49 22.02,4.36 v21.95,4.06 | v16.05,6.4 16.31,6.25 16.05,5.8 15.79,6.25 v16.05,6.4
TRST  (via drill 0.4)
  Top 0.203: v19.71,4.06 19.51,4.27 19.51,5.89 19.3,6.1 19.3,6.71 18.66,7.35 IC8.40 | v19.71,4.06 19.41,4.12 19.51,4.63 19.9,4.29 v19.71,4.06
  Bottom 0.203: JTAG.P$4 20.78,2.79 20.73,2.85 20.73,3.66 20.32,4.06 v19.71,4.06 | R25.1 18.25,4.06 v19.71,4.06 | v19.71,4.06 19.86,4.33 20.31,4.06 19.86,3.8 v19.71,4.06 | v19.71,4.06 19.56,3.8 19.11,4.06 19.56,4.33 v19.71,4.06
TXD  (via drill 0.4)
  Top 0.203: v31.7,13.41 31.7,13.11 31.09,12.5 31.09,8.53 31.09,6.3 v32.11,5.28 | 18.69,17.13 IC8.21 18.66,19.54 v18.49,19.71 | v32.11,5.28 31.81,5.21 31.68,5.71 32.18,5.58 v32.11,5.28 | v31.7,13.41 31.88,13.17 31.46,12.86 31.4,13.38 v31.7,13.41 | v18.49,19.71 18.78,19.64 18.66,19.14 18.29,19.49 v18.49,19.71
  Bottom 0.203: R5.1 37.39,2.6 37.39,7.72 36.78,8.33 34.14,8.33 33.53,7.72 33.53,5.69 33.12,5.28 v32.11,5.28 | v31.7,13.41 31.09,14.02 29.87,14.02 28.04,15.85 28.04,17.88 28.04,18.09 26.01,20.12 19.91,20.12 19.1,20.12 18.9,20.12 v18.49,19.71 | v32.11,5.28 32.26,5.54 32.71,5.28 32.26,5.02 v32.11,5.28 | v31.7,13.41 31.41,13.33 31.27,13.84 31.78,13.7 v31.7,13.41 | v18.49,19.71 18.43,20 18.93,20.12 18.78,19.62 v18.49,19.71
USB_+5V  (via drill 0.4)
  Top 0.203: U3.PIN_1 7.64,5.77 7.32,6.1 v6.6,6.1 | v6.6,6.1 6.76,6.36 7.2,6.1 6.76,5.83 v6.6,6.1
  Bottom 0.203: D7.3 8.36,4.57 7.64,5.28 7.11,5.28 6.6,5.79 v6.6,6.1 | v6.6,6.1 6.9,6.06 6.85,5.55 6.43,5.85 v6.6,6.1
USB_DM  (via drill 0.4)
  Top 0.203: IC8.32 13.47,11.85 13.01,11.38 13.01,10.16 12.19,9.35 11.38,8.53 v10.77,8.53 | v9.14,8.53 7.32,8.53 6.87,8.09 R34.2 | v10.77,8.53 10.92,8.79 11.37,8.53 10.92,8.27 v10.77,8.53 | v9.14,8.53 8.99,8.27 8.54,8.53 8.99,8.79 v9.14,8.53
  Bottom 0.203: v10.77,8.53 9.96,8.53 v9.14,8.53 | C18.1 8.5,8.53 v9.14,8.53 | v10.77,8.53 10.62,8.27 10.17,8.53 10.62,8.79 v10.77,8.53 | v9.14,8.53 9.3,8.79 9.74,8.53 9.3,8.27 v9.14,8.53 | v9.14,8.53 8.99,8.27 8.54,8.53 8.99,8.79 v9.14,8.53
USB_DP  (via drill 0.4)
  Top 0.203: 15.01,11.35 IC8.33 13.58,11.35 13.41,11.18 13.41,9.35 12.8,8.74 v12.8,7.32 | v12.8,7.32 C17.1 | v12.8,7.32 12.54,7.47 12.8,7.92 13.06,7.47 v12.8,7.32 | v12.8,7.32 12.65,7.05 12.2,7.32 12.65,7.58 v12.8,7.32
  Bottom 0.203: C17.1 v12.8,7.32 | v12.8,7.32 12.65,7.05 12.2,7.32 12.65,7.58 v12.8,7.32
V_BATT  (via drill 0.4)
  Top 0.203: v23.57,16.15 23.47,16.15 22.66,16.96 IC8.13 | v23.57,16.15 23.29,16.04 23.1,16.52 23.61,16.45 v23.57,16.15
  Bottom 0.203: JP12.P$9 43.74,6.04 42.88,6.91 42.88,7.72 42.47,8.13 42.47,8.74 42.06,9.14 42.06,9.96 40.64,11.38 38.61,11.38 35.97,8.74 30.89,8.74 25.2,14.43 23.57,16.05 v23.57,16.15 | v23.57,16.15 23.87,16.2 23.94,15.68 23.46,15.87 v23.57,16.15

## Text on the board
Bottom: V0.1 | cc-by-sa
bStop: V0.1 | cc-by-sa